# Altium PCB PCB1.PcbDoc
Units mil, origin at the board's own origin, x right, y up, seen from the top; angles counter-clockwise.
Board outline 6000 x 4000 mil, 2 copper layers (Top Layer, Bottom Layer); 30 components, 47 nets, 148 pads, 0 vias.
Unrouted connection lines stored in the file: 97.
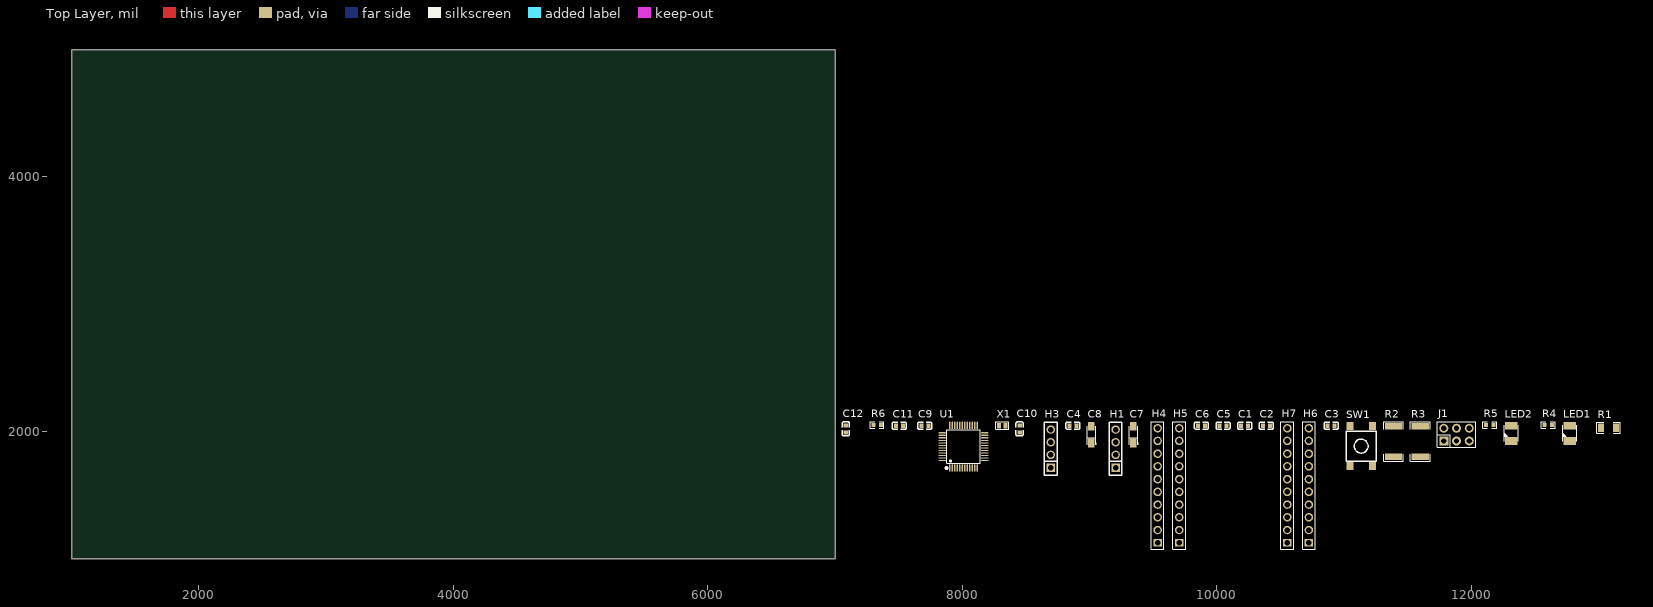
[diagram p0: Top Layer view]
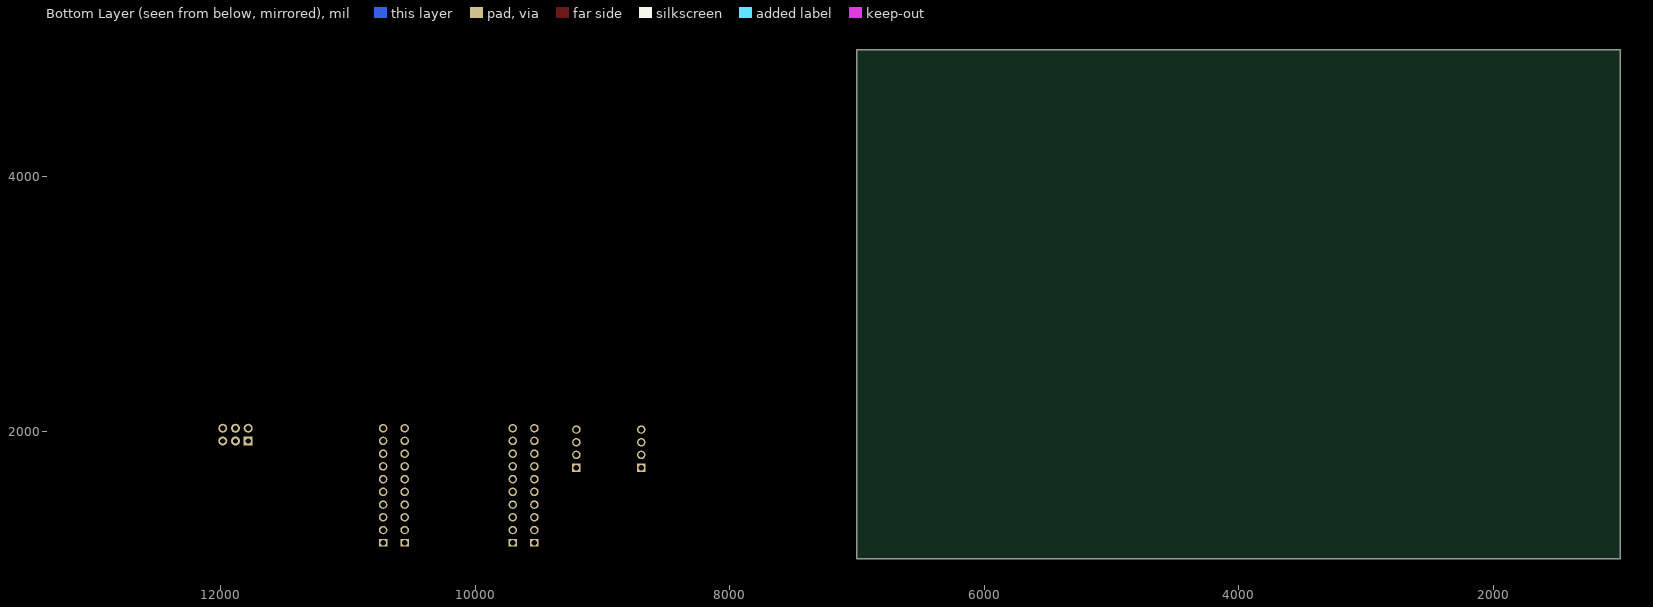
[diagram p1: Bottom Layer view, seen from below]

## Layer stack, top to bottom
Top Solder: solder mask 0.4, Solder Resist, Dk 3.5
Top Layer: signal copper 1.4
Dielectric 1: dielectric 12.6, FR-4, Dk 4.8
Bottom Layer: signal copper 1.4
Bottom Solder: solder mask 0.4, Solder Resist, Dk 3.5

## Board outline
1000,1000 7000,1000 7000,5000 1000,5000

## Design rules (kind name [scope] priority, off if disabled: settings)
Clearance [All] p1: gap=10 ignorepadtopadclearanceinfootprint=FALSE except(0: Arc-Hole Track-Hole SMDPad-Hole THPad-Hole Via-Hole Fill-Hole Poly-Hole Region-Hole Text-Hole)
PolygonConnect [All] p1: connectstyle=Relief reliefconductorwidth=10 reliefentries=4 polygonreliefangle="90 Angle" airgapwidth=10
RoomDefinition 1_P1 [InComponentClass('1_P1')] p1: confinementstyle=ConfineIn formatcopy=TRUE lockcomponents=FALSE outline 7045,1060 13180,1060 13180,2185 7045,2185
RoutingVias [All] p1: holewidth=28 width=50 viastyle="Through Hole" minholewidth=28 minwidth=50 maxholewidth=28 maxwidth=50
SolderMaskExpansion [All] p1: expansion=4 istentingtop=FALSE
Width [All] p1: maxlimit=10 minlimit=10 preferedwidth=10
30 further rules are at their usual default settings.

## Components (designator, comment, footprint, x,y, rotation, side; value= is the part's Value field where it differs from the comment)
C1 "CL10F104ZB8NNNC" C0603 10220,2045 r0 top value=100nF
C2 "CL10F104ZB8NNNC" C0603 10390,2045 r0 top value=100nF
C3 "CL10F104ZB8NNNC" C0603 10900,2045 r0 top value=100nF
C4 "CL10F104ZB8NNNC" C0603 8870,2045 r0 top value=100nF
C5 "CL10F104ZB8NNNC" C0603 10050,2045 r0 top value=100nF
C6 "CL10F104ZB8NNNC" C0603 9880,2045 r0 top value=100nF
C7 "CA45-A-35V-0.1UF-K" CAP-SMD_L3.2-W1.6-RD 9345,1975 r90 top value=100nF
C8 "CA45-A-35V-0.1UF-K" CAP-SMD_L3.2-W1.6-RD 9015,1975 r90 top value=100nF
C9 "CL10C220JB8NNNC" C0603 7705,2045 r0 top value=22pF
C10 "CL10C220JB8NNNC" C0603 8450,2020 r90 top value=22pF
C11 "CL10C220JB8NNNC" C0603 7505,2045 r0 top value=22pF
C12 "CL10C220JB8NNNC" C0603 7085,2020 r90 top value=22pF
H1 "B-2100S04P-A110" HDR-TH_4P-P2.54-V-M 9205,1865 r90 top
H3 "B-2100S04P-A110" HDR-TH_4P-P2.54-V-M 8695,1865 r90 top
H4 "2.54-1*10P针" HDR-TH_10P-P2.54-V-M-1 9535,1575 r90 top
H5 "2.54-1*10P针" HDR-TH_10P-P2.54-V-M-1 9705,1575 r90 top
H6 "2.54-1*10P针" HDR-TH_10P-P2.54-V-M-1 10725,1575 r90 top
H7 "2.54-1*10P针" HDR-TH_10P-P2.54-V-M-1 10555,1575 r90 top
J1 "2.54-2*3P针" HDR-TH_6P-P2.54-V-M-R2-C3-S2.54-1 11885,1975 r0 top
LED1 "67-21/RSC-FT2V1B/2T_1" LED-SMD_L3.1-W2.7-FD-1 12775,1985 r90 top
LED2 "67-21/RSC-FT2V1B/2T_1" LED-SMD_L3.1-W2.7-FD-1 12315,1985 r90 top
R1 "TR1206D9K00P0550Z" R1206 13080,2030 r0 top value=10kΩ
R2 "SCR2512J100K" R2512 11390,1920 r90 top
R3 "SCR2512J100K" R2512 11600,1920 r90 top
R4 "SCR0603J510R" R0603 12605,2050 r0 top
R5 "SCR0603J510R" R0603 12145,2050 r0 top
R6 "SCR0603J1M" R0603 7330,2050 r0 top
SW1 "TS-KG02S" SW-SMD_4P-L6.0-W6.0-P3.90-LS9.5 11135,1885 r90 top
U1 "STM32F103C8T6" LQFP-48_L7.0-W7.0-P0.50-LS9.0-BL 8010,1880 r0 top
X1 "TFX-04-32.768K" OSC-SMD_2P-L1.6-W1.0 8315,2045 r0 top value=-

## Footprints (in the part's own frame and the unit in brackets; to place one, negate y for a bottom-side part, rotate by r counter-clockwise, add the part's x,y. Pads: shape width x height; smd on the part's side, far side on the other; paste and mask are expansions set on the pad)
C0603 [mm]
  rect 0.8x0.9 smd mask+0.051: 1(-0.7,0) 2(0.7,0)
  silkscreen extent -1.41,-0.71 1.39,0.72
CAP-SMD_L3.2-W1.6-RD [mil]
  rect 69.19x51.02 smd mask+2: 1(-66.39,0) 2(66.39,0)
  silkscreen extent -81,-37 66,37
HDR-TH_4P-P2.54-V-M [mil]
  rect 66.9x66.9 hole 43.3 mask+2: 1(-150,0)
  round 66.9 hole 43.3 mask+2: 2(-50,0) 3(50,0) 4(150,0)
  silkscreen extent -208,-50 208,50
HDR-TH_6P-P2.54-V-M-R2-C3-S2.54-1 [mil]
  rect 70.9x70.9 hole 41.3 mask+2: 1(-100,-50)
  round 70.9 hole 41.3 mask+2: 2(-100,50) 3(0,-50) 4(0,50) 5(100,-50) 6(100,50)
  silkscreen extent -150,-100 150,100
HDR-TH_10P-P2.54-V-M-1 [mil]
  rect 62x66.9 hole 43.3 mask+2: 1(-450,0)
  round 66.9 hole 43.3 mask+2: 2(-350,0) 3(-250,0) 4(-150,0) 5(-50,0) 6(50,0) 7(150,0) 8(250,0) 9(350,0) 10(450,0)
  silkscreen extent -500,-50 500,50
LED-SMD_L3.1-W2.7-FD-1 [mil]
  rect 59.1x99.2 smd mask+2: 1(-60.2,0) 2(60.2,0)
  silkscreen extent -64,-56 64,56
LQFP-48_L7.0-W7.0-P0.50-LS9.0-BL [mm]
  oval 0.27x1.5 smd mask+0.05: 1(-2.75,-4.25) 2(-2.25,-4.25) 3(-1.75,-4.25) 4(-1.25,-4.25) 5(-0.75,-4.25) 6(-0.25,-4.25) 7(0.25,-4.25) 8(0.75,-4.25) 9(1.25,-4.25) 10(1.75,-4.25) 11(2.25,-4.25) 12(2.75,-4.25) 25(2.75,4.25) 26(2.25,4.25) 27(1.75,4.25) 28(1.25,4.25) 29(0.75,4.25) 30(0.25,4.25) 31(-0.25,4.25) 32(-0.75,4.25) 33(-1.25,4.25) 34(-1.75,4.25) 35(-2.25,4.25) 36(-2.75,4.25)
  oval 1.5x0.27 smd mask+0.05: 13(4.25,-2.75) 14(4.25,-2.25) 15(4.25,-1.75) 16(4.25,-1.25) 17(4.25,-0.75) 18(4.25,-0.25) 19(4.25,0.25) 20(4.25,0.75) 21(4.25,1.25) 22(4.25,1.75) 23(4.25,2.25) 24(4.25,2.75) 37(-4.25,2.75) 38(-4.25,2.25) 39(-4.25,1.75) 40(-4.25,1.25) 41(-4.25,0.75) 42(-4.25,0.25) 43(-4.25,-0.25) 44(-4.25,-0.75) 45(-4.25,-1.25) 46(-4.25,-1.75) 47(-4.25,-2.25) 48(-4.25,-2.75)
  silkscreen extent -3.59,-4.46 3.3,3.34
OSC-SMD_2P-L1.6-W1.0 [mm]
  rect 0.8x1.06 smd mask+0.051: 1(-0.66,0) 2(0.66,0)
  silkscreen extent -1.29,-0.76 1.29,0.76
R0603 [mil]
  rect 31.75x34.02 smd mask+2: 1(-29.66,0) 2(29.66,0)
  silkscreen extent -55,-26 55,26
R1206 [mil]
  rect 47.54x66.97 smd mask+2: 1(-58.22,0) 2(58.22,0)
  silkscreen extent -91,-42 91,42
R2512 [mil]
  rect 50.49x136.06 smd mask+2: 1(-120.72,0) 2(120.72,0)
  silkscreen extent -155,-77 155,77
SW-SMD_4P-L6.0-W6.0-P3.90-LS9.5 [mil]
  rect 63x55.1 smd mask+2: 1(-157.5,88.6) 2(157.5,88.6) 3(-157.5,-88.6) 4(157.5,-88.6)
  silkscreen extent -118,-118 118,118

## Part data
C1 C2 C3 C4 C5 C6: "容值:100nF;精度:-20%~+80%;额定电压:50V;材质(温度系数):Y5V;", JLCPCB Part Class="Extended Part", LCSC Part Name="100nF -20%~+80% 50V", Manufacturer=SAMSUNG(三星), Temperature Coefficient=Y5V, Tolerance=-20%~+80%, Voltage Rated=50V, Add into BOM=yes, Convert to PCB=yes, Datasheet=https://atta.szlcsc.com/upload/public/pdf/source/20160103/1457707690730.pdf, Device=CL10F104ZB8NNNC, Manufacturer Part=CL10F104ZB8NNNC, Supplier=LCSC, Supplier Footprint=0603, Supplier Part=C1688, Symbol=CL10F104ZB8NNNC
C7 C8: "容值:100nF;精度:±10%;额定电压:35V;工作温度:-55~+125;", JLCPCB Part Class="Extended Part", LCSC Part Name="100nF ±10% 35V", Manufacturer=CEC(振华新云), Operating Temperature=-55~+125, Rated Voltage=35V, Tolerance=±10%, Add into BOM=yes, Convert to PCB=yes, Datasheet=https://atta.szlcsc.com/upload/public/pdf/source/20220222/C2C5F368BEBB90E653B4407F98E5644A.pdf, Device=CA45-A-35V-0.1UF-K, Manufacturer Part=CA45-A-35V-0.1UF-K, Supplier=LCSC, Supplier Footprint=SMD,3.2x1.6x1.6mm, Supplier Part=C2976900, Symbol=CA45-A-35V-0.1UF-K
C9 C10 C11 C12: "容值:22pF;精度:±5%;额定电压:50V;材质(温度系数):C0G;", JLCPCB Part Class="Basic Part", LCSC Part Name="22pF ±5% 50V", Manufacturer=SAMSUNG(三星), Temperature Coefficient=C0G, Tolerance=±5%, Voltage Rated=50V, Add into BOM=yes, Convert to PCB=yes, Datasheet=https://atta.szlcsc.com/upload/public/pdf/source/20160103/1457707687317.pdf, Device=CL10C220JB8NNNC, Manufacturer Part=CL10C220JB8NNNC, Supplier=LCSC, Supplier Footprint=0603, Supplier Part=C1653, Symbol=CL10C220JB8NNNC
H1 H3: "间距:2.54mm;总PIN位数:4;排数:1;插针结构:1x4P;行距:-;安装类型:直插;圆针/方针:-;额定电流:-;额定电压:-;配合针长度:6mm;塑高:2.54mm;端接针长度:3mm;触头材质:黄铜;触头镀层:-;工作温度范围:-40~+105;颜色:黑色;", Color=黑色, Current Rating (Max)=-, JLCPCB Part Class="Extended Part", LCSC Part Name="2.54mm 1x4P 直插", Manufacturer=Ckmtw(灿科盟), Operating Temperature Range=-40~+105, Add into BOM=yes, Circluar Pins/Square Pins=-, Contact Material=黄铜, Contact Plating=-, Convert to PCB=yes, Datasheet=https://atta.szlcsc.com/upload/public/pdf/source/20170821/C124378_1503303307508901532.pdf, Device=B-2100S04P-A110, Insulation Height=2.54mm, Length of End Connection Pin=3mm, Length of Mating Pin=6mm, Manufacturer Part=B-2100S04P-A110, Mounting Type=直插, Number of Pins=4, Number of Rows=1, Pin Structure=1x4P, Pitch=2.54mm, Row Spacing=-, Supplier=LCSC, Supplier Footprint=直插,P=2.54mm, Supplier Part=C124378, Symbol=Header-Male-2.54_1x4, Voltage Rating (Max)=-
H4 H5 H6 H7: "间距:2.54mm;总PIN位数:10;排数:1;插针结构:1x10P;行距:-;安装类型:直插;圆针/方针:方针;额定电流:3A;额定电压:-;配合针长度:-;塑高:-;端接针长度:-;触头材质:-;触头镀层:-;工作温度范围:-40~+105;颜色:黑色;", Color=黑色, Current Rating (Max)=3A, JLCPCB Part Class="Extended Part", LCSC Part Name="2.54mm 1x10P 直插 方针", Manufacturer=BOOMELE(博穆精密), Operating Temperature Range=-40~+105, Voltage Rating (Max)=-, Add into BOM=yes, Circluar Pins/Square Pins=方针, Contact Material=-, Contact Plating=-, Convert to PCB=yes, Datasheet=https://atta.szlcsc.com/upload/public/pdf/source/20151109/1457707572883.pdf, Device=2.54-1*10P针, Insulation Height=-, Length of End Connection Pin=-, Length of Mating Pin=-, Manufacturer Part=2.54-1*10P针, Mounting Type=直插, Number of Pins=10, Number of Rows=1, Pin Structure=1x10P, Pitch=2.54mm, Row Spacing=-, Supplier=LCSC, Supplier Footprint=插件,P=2.54mm, Supplier Part=C57369, Symbol=Header-Male-2.54_1x10
J1: "间距:2.54mm;总PIN位数:6;排数:2;插针结构:-;行距:-;安装类型:直插;圆针/方针:-;额定电流:-;额定电压:-;配合针长度:-;塑高:-;触头材质:-;触头镀层:-;颜色:黑色;", Color=黑色, Current Rating (Max)=-, JLCPCB Part Class="Extended Part", LCSC Part Name="2.54mm 直插", Manufacturer=BOOMELE(博穆精密), Add into BOM=yes, Circluar Pins/Square Pins=-, Contact Material=-, Contact Plating=-, Convert to PCB=yes, Datasheet=https://atta.szlcsc.comnull, Device=2.54-2*3P针, Insulation Height=-, Length of Mating Pin=-, Manufacturer Part=2.54-2*3P针, Mounting Type=直插, Number of Pins=6, Number of Rows=2, Pin Structure=-, Pitch=2.54mm, Row Spacing=-, Supplier=LCSC, Supplier Footprint=直插,P=2.54mm, Supplier Part=C65114, Symbol=Header-Male-2.54_2x3, Voltage Rating (Max)=-
LED1 LED2: JLCPCB Part Class="Extended Part", LCSC Part Name=LED, Manufacturer=EVERLIGHT(亿光), Manufacturer Part=67-21/RSC-FT2V1B/2T, Add into BOM=yes, Convert to PCB=yes, Datasheet=https://atta.szlcsc.com/upload/public/pdf/source/20220713/BE7199A589B2EC6E250CD65CD7D14552.pdf, Device=67-21/RSC-FT2V1B/2T_1, Supplier=LCSC, Supplier Footprint=SMD-2,2.7x3.1mm, Supplier Part=C4749159, Symbol=67-21/RSC-FT2V1B/2T_C4749159
R1: "电阻类型:薄膜电阻;阻值:9kΩ;精度:±0.5%;功率:250mW;温度系数:±50ppm/;最大工作电压:200V;工作温度范围:-55~+155;", JLCPCB Part Class="Extended Part", LCSC Part Name="9kΩ ±0.5%", Manufacturer="EVER OHMS(天二科技)", Operating Temperature Range=-55~+155, Overload Voltage (Max)=200V, Power(Watts)=250mW, Temperature Coefficient=±50ppm/, Tolerance=±0.5%, Add into BOM=yes, Convert to PCB=yes, Datasheet=https://atta.szlcsc.com/upload/public/pdf/source/20190415/C150026_5B6B5529535D7231535B38A00DA69B28.pdf, Device=TR1206D9K00P0550Z, Manufacturer Part=TR1206D9K00P0550Z, Supplier=LCSC, Supplier Footprint=1206, Supplier Part=C150026, Symbol=TR1206D9KP0550, Type=薄膜电阻
R2 R3: JLCPCB Part Class="Extended Part", LCSC Part Name="±5% 100K", Manufacturer=VO(翔胜), Add into BOM=yes, Convert to PCB=yes, Datasheet=https://atta.szlcsc.com/upload/public/pdf/source/20220513/247AF9639BA21CF93567DC289CCC6A22.pdf, Device=SCR2512J100K, Manufacturer Part=SCR2512J100K, Supplier=LCSC, Supplier Footprint=2512, Supplier Part=C3018375, Symbol=SCR2512J100K
R4 R5: JLCPCB Part Class="Extended Part", LCSC Part Name="±5% 510R", Manufacturer=VO(翔胜), Add into BOM=yes, Convert to PCB=yes, Datasheet=https://atta.szlcsc.com/upload/public/pdf/source/20220513/247AF9639BA21CF93567DC289CCC6A22.pdf, Device=SCR0603J510R, Manufacturer Part=SCR0603J510R, Supplier=LCSC, Supplier Footprint=0603, Supplier Part=C3017743, Symbol=SCR0603J510R
R6: JLCPCB Part Class="Extended Part", LCSC Part Name="±5% 1M", Manufacturer=VO(翔胜), Add into BOM=yes, Convert to PCB=yes, Datasheet=https://atta.szlcsc.com/upload/public/pdf/source/20220513/247AF9639BA21CF93567DC289CCC6A22.pdf, Device=SCR0603J1M, Manufacturer Part=SCR0603J1M, Supplier=LCSC, Supplier Footprint=0603, Supplier Part=C3017671, Symbol=SCR0603J1M
SW1: "触点电流:50mA;额定电压(DC):12V;绝缘电阻:100MΩ;电路结构:单刀单掷;安装方式:立贴;按钮形状:圆形按钮;带灯:-;开关长度:6mm;开关宽度:6mm;开关高度:4.3mm;", Contact Current=50mA, Insulation Resistance=100MΩ, JLCPCB Part Class="Extended Part", LCSC Part Name=6*6轻触贴片微动按键开关四脚, Manufacturer=汉博(HANBO), Voltage Rating (DC)=12V, Actuator Style=圆形按钮, Add into BOM=yes, Circuit=单刀单掷, Convert to PCB=yes, Datasheet=https://atta.szlcsc.com/upload/public/pdf/source/20201230/C410366_9ED50E2AC39ADCBB1E9D3DFF4A46B08A.pdf, Device=TS-KG02S, Manufacturer Part=TS-KG02S, Mounting Style=立贴, Supplier=LCSC, Supplier Footprint=SMD,6x6x4.3mm, Supplier Part=C410366, Switch Height=4.3mm, Switch Length=6mm, Switch Width=6mm, Symbol=TS-KG02S, With Lamp=-
U1: "CPU内核:ARM Cortex-M3;CPU最大主频:72MHz;工作电压范围:2V~3.6V;内部振荡器:有;程序 FLASH容量:64K@x8bit;RAM总容量:20KB;EEPROM/数据 FLASH容量:-;GPIO端口数量:37;ADC(单元数/通道数/位数):1@x10ch/12bit;外设/功能/协议栈:温度传感器；DMA；看门狗；POR；PWM;工作温度范围:-40~+85;", JLCPCB Part Class="Basic Part", LCSC Part Name="STM32F103C8T6 MSL=3", Manufacturer=ST(意法半导体), Maximum Frequency=72MHz, Operating Temperature Range=-40~+85, Supply Voltage Range=2V~3.6V, ADC (Units/Channels/bits)=1@x10ch/12bit, Add into BOM=yes, Convert to PCB=yes, CPU Core="ARM Cortex-M3", Datasheet=https://atta.szlcsc.com/upload/public/pdf/source/20140724/1457707174202.pdf, Device=STM32F103C8T6, EEPROM/Data FLASH Size=-, GPIO Ports Number=37, Internal Oscillator=有, Manufacturer Part=STM32F103C8T6, Peripherals / Functions / Protocol Stacks=温度传感器；DMA；看门狗；POR；PWM, Program FLASH Size=64K@x8bit, RAM Size=20KB, Supplier=LCSC, Supplier Footprint=LQFP-48_7x7x05P, Supplier Part=C8734, Symbol=STM32F103C8T6
X1: "晶振类型:-;频率:-;频率公差:-;频率稳定度:-;负载电容:-;工作温度:-;", Frequency Stability=-, JLCPCB Part Class="Extended Part", LCSC Part Name="时钟晶体 32.768kHz", Manufacturer=RIVER(大河), Add into BOM=yes, Convert to PCB=yes, Crystal Type=-, Datasheet=https://atta.szlcsc.com/upload/public/pdf/source/20200917/C515346_EDFB4A3F7406CD145B2E2A90CB656616.pdf, Device=TFX-04-32.768K, Frequency Tolerance=-, Load Capacitance=-, Manufacturer Part=TFX-04-32.768K, Operating Temperature=-, Supplier=LCSC, Supplier Footprint=SMD1610-2P, Supplier Part=C515348, Symbol=TFX-04-32.768K_C515348

## Nets (pads, with @x,y where several pads share a name; then routed paths per layer and width w, separated by ;. In a path a pad name is that pad's centre, name@x,y a point inside that pad or via, vN(x,y) a via of type N, cw(c..) or ccw(c..) an arc to the next point about the centre after c; other vN are vias at no path point)
+3.3V: C1.2 C2.2 C4.1 C5.2 C6.2 C8.1 H3.1 H5.8 H6.1 H6.3 J1.1 J1.2 LED1.1 LED2.1 R1.2 U1.9 U1.24 U1.36 U1.48
+5V: C7.1
BOOT0: R2.1 U1.44
BOOT1: R3.2 U1.20
GND: C1.1 C2.1 C3.1 C4.2 C5.1 C6.1 C7.2 C8.2 C9.1 C10.1 C11.1 C12.1 H3.2 H5.9 H5.10 H6.2 J1.5 J1.6 R4.2 SW1.4 U1.8 U1.23 U1.35 U1.47
NetJ1_3: J1.3 R2.2
NetJ1_4: J1.4 R3.1
NetLED1_2: LED1.2 R4.1
NetLED2_2: LED2.2 R5.1
OSCIN: C11.2 R6.2 U1.5
OSCOUT: C12.2 R6.1 U1.6
PA0: H4.5 U1.10
PA1: H4.6 U1.11
PA2: H4.7 U1.12
PA3: H4.8 U1.13
PA4: H4.9 U1.14
PA5: H4.10 U1.15
PA6: H5.1 U1.16
PA7: H5.2 U1.17
PA8: H7.6 U1.29
PA9: H3.3 H7.5 U1.30
PA10: H3.4 H7.4 U1.31
PA11: H7.3 U1.32
PA12: H7.2 U1.33
PA15: H7.1 U1.38
PB0: H5.3 U1.18
PB1: H5.4 U1.19
PB3: H6.10 U1.39
PB4: H6.9 U1.40
PB5: H6.8 U1.41
PB6: H6.7 U1.42
PB7: H6.6 U1.43
PB8: H6.5 U1.45
PB9: H6.4 U1.46
PB10: H5.5 U1.21
PB11: H5.6 U1.22
PB12: H7.10 U1.25
PB13: H7.9 U1.26
PB14: H7.8 U1.27
PB15: H7.7 U1.28
PC13: H4.2 R5.2 U1.2
PC14: C10.2 H4.3 U1.3 X1.2
PC15: C9.2 H4.4 U1.4 X1.1
RESET: C3.2 H5.7 R1.1 SW1.1 U1.7
SWDCLK: H1.3 U1.37
SWDIO: H1.2 U1.34
VBAT: H4.1 U1.1
pads on no net: H1.1 H1.4 SW1.2 SW1.3